# Altium PCB SD171-5.0PCB2.PcbDoc (part 3 of 5)
Units mm, origin at the board's own origin, x right, y up, seen from the top; angles counter-clockwise.
Board outline 152.27 x 99.6 mm, 6 copper layers (Top Layer, InternalPlane1, Mid-Layer 1, Mid-Layer 2, InternalPlane2, Bottom Layer); 325 components, 250 nets, 1794 pads, 490 vias.
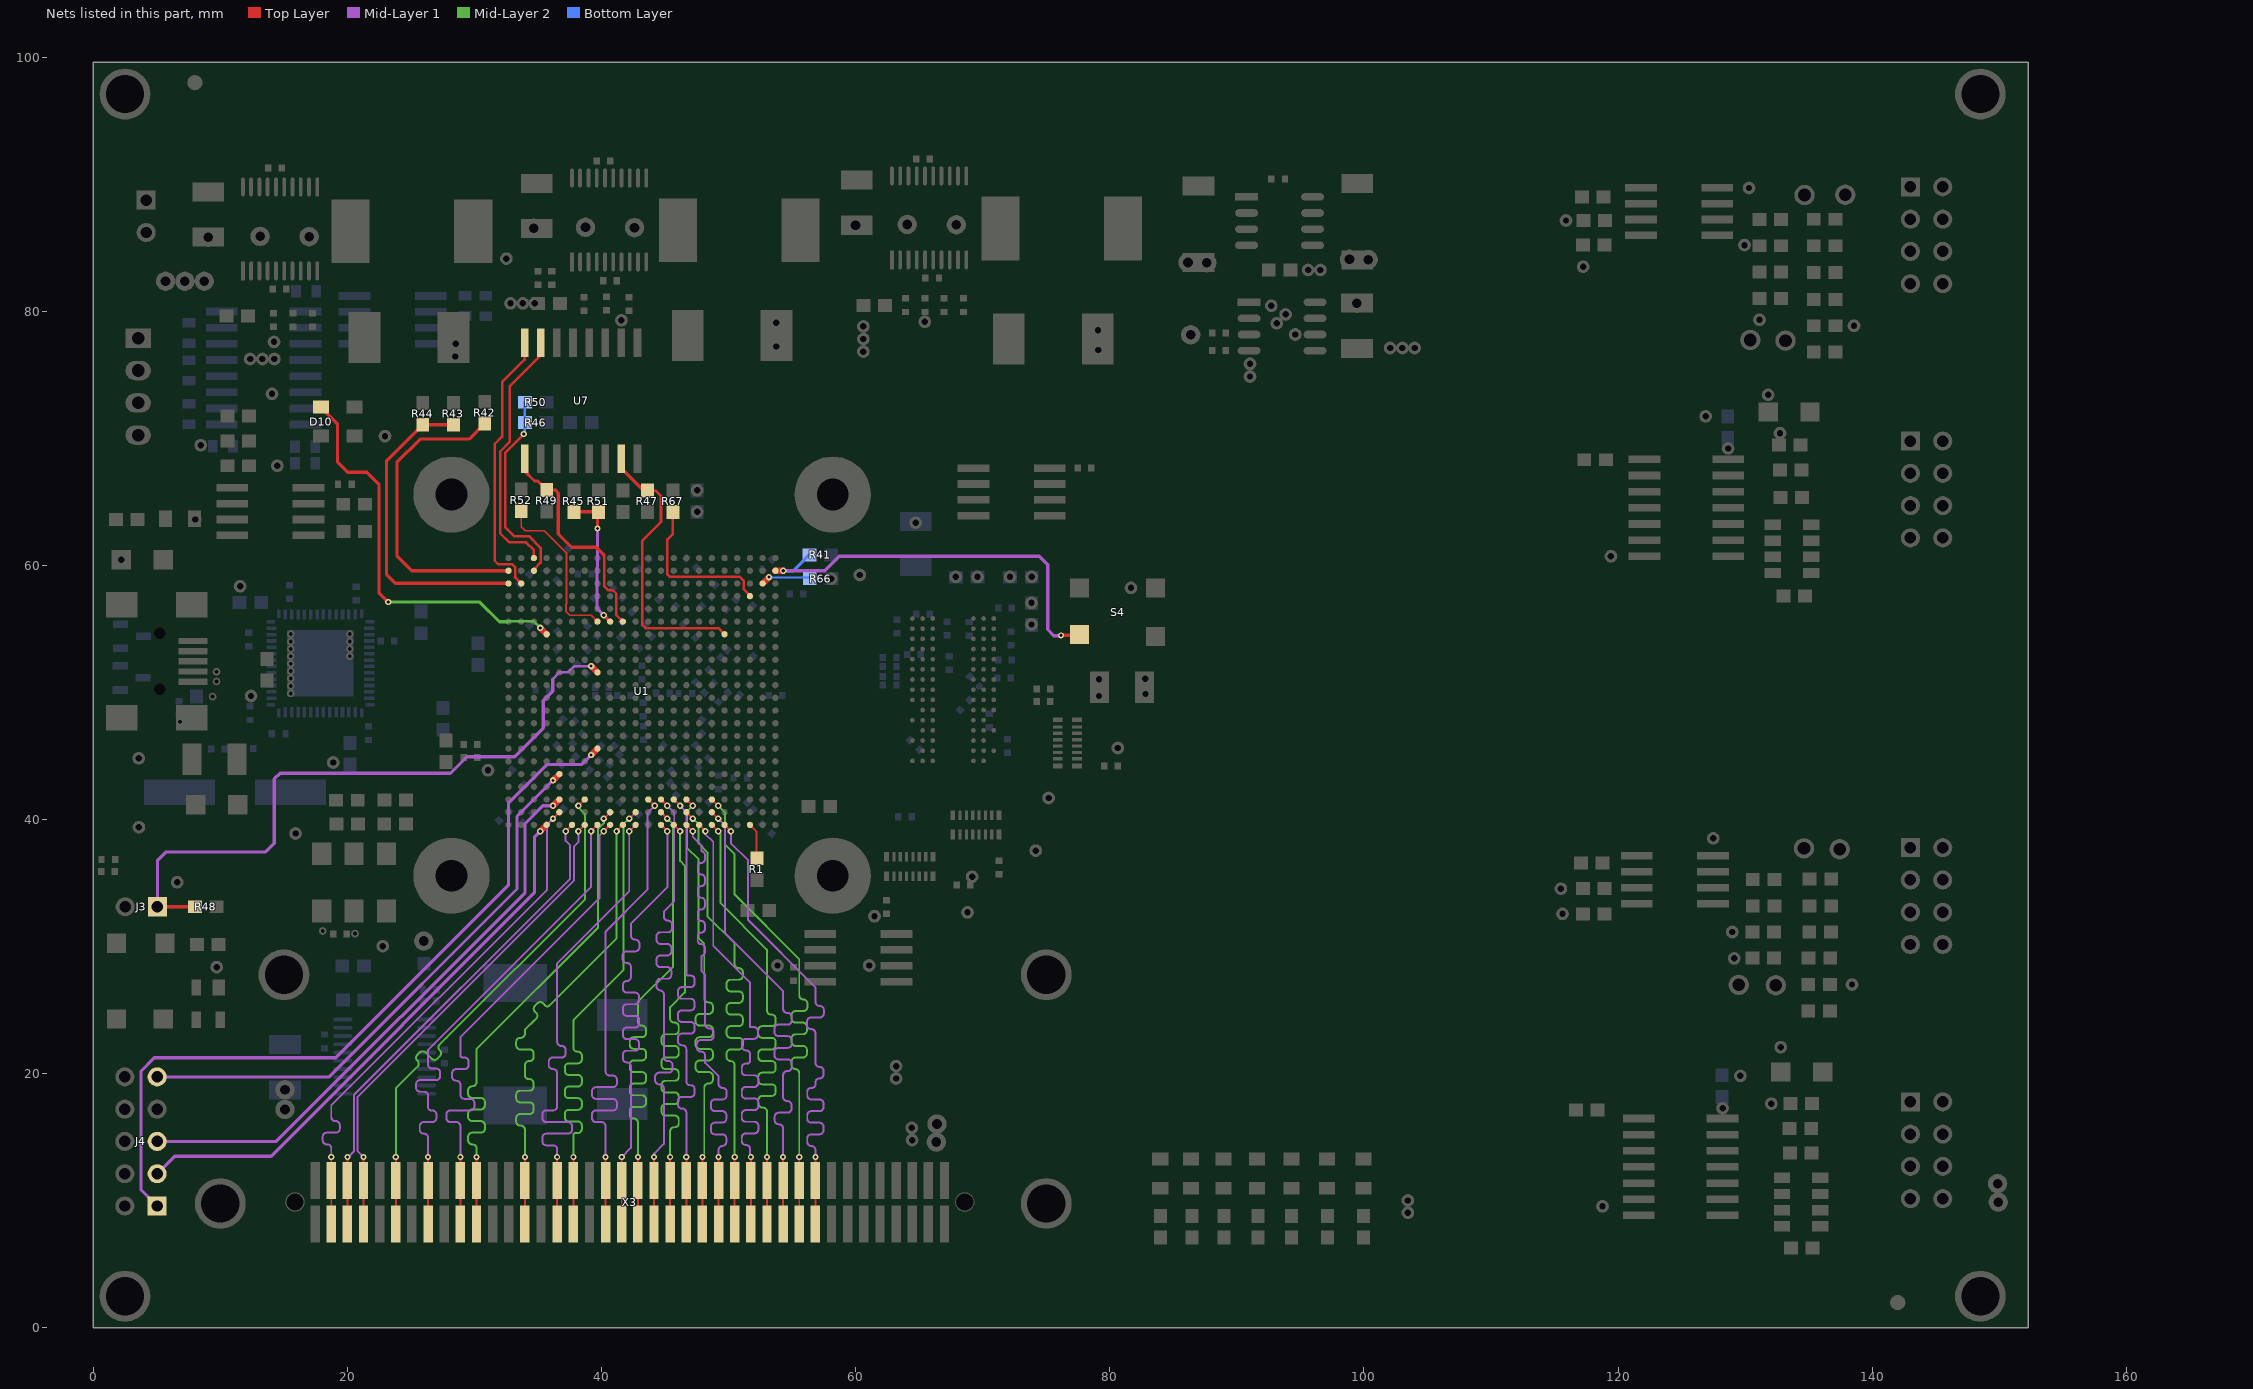
[diagram p7: the nets of this part, all layers, seen from the top]

## Via types
v1: diameter 0.508, hole 0.254, Top Layer to Bottom Layer, 259 vias
v2: diameter 0.483, hole 0.254, Top Layer to Bottom Layer, 230 vias
v3: diameter 0.483, hole 0.254, Top Layer to Bottom Layer, tented top, 1 vias

## Nets (pads, with @x,y where several pads share a name; then routed paths per layer and width w, separated by ;. In a path a pad name is that pad's centre, name@x,y a point inside that pad or via, vN(x,y) a via of type N, cw(c..) or ccw(c..) an arc to the next point about the centre after c; other vN are vias at no path point) (continued)
E-RXCLK: U1.B10 X3.39 X3.40 | length 41.7
  Top Layer w0.152: X3.39@42.86,8.191 X3.40@42.86,11.621 v2(42.86,13.449) ; U1.B10@44.68,40.589 v1(45.18,40.089)
  Mid-Layer 2 w0.152: 42.54,16.485 cw(c42.54,16.165) 42.86,16.165 42.86,15.824 v2(42.86,13.449) ; 42.541,16.485 cw(c42.541,16.805) 42.221,16.805 42.221,17.079 cw(c42.541,17.079) 42.541,17.399 42.86,17.399 43.179,17.399 ccw(c43.179,17.719) 43.499,17.719 43.499,17.993 ccw(c43.179,17.993) 43.179,18.313 42.86,18.313 42.541,18.313 cw(c42.541,18.633) 42.221,18.633 42.221,18.908 cw(c42.541,18.908) 42.541,19.228 42.86,19.228 43.179,19.228 ccw(c43.179,19.548) 43.499,19.548 43.499,19.822 ccw(c43.179,19.822) 43.179,20.142 42.86,20.142 42.541,20.142 cw(c42.541,20.462) 42.221,20.462 42.221,20.737 cw(c42.541,20.737) 42.541,21.057 42.86,21.057 43.179,21.057 ccw(c43.179,21.377) 43.499,21.377 43.499,21.651 ccw(c43.179,21.651) 43.179,21.971 42.86,21.971 42.541,21.971 cw(c42.541,22.291) 42.221,22.291 42.221,22.565 cw(c42.541,22.565) 42.541,22.885 42.86,22.885 43.18,22.885 ccw(c43.18,23.205) 43.5,23.205 43.5,23.48 ccw(c43.18,23.48) 43.18,23.8 cw(c43.18,24.12) 42.86,24.12 42.86,24.257 42.86,25.664 45.637,28.441 45.637,39.632 v1(45.18,40.089)
E-RXD0: U1.A8 X3.29 X3.30 | length 41.7
  Top Layer w0.152: U1.A8@46.68,39.589 v1(47.18,39.089) ; X3.29@49.21,8.191 X3.30@49.21,11.621 49.21,13.234 v2(49.21,13.449)
  Mid-Layer 1 w0.152: v1(47.18,39.089) 47.18,38.647 47.854,37.973 47.854,37.516 cw(c47.854,37.236) 48.133,37.236 48.133,36.881 cw(c47.854,36.881) 47.854,36.601 ccw(c47.854,36.322) 47.574,36.322 47.574,35.966 ccw(c47.854,35.966) 47.854,35.687 cw(c47.854,35.408) 48.133,35.408 48.133,35.052 cw(c47.854,35.052) 47.854,34.773 ccw(c47.854,34.493) 47.574,34.493 47.574,34.138 ccw(c47.854,34.138) 47.854,33.858 cw(c47.854,33.579) 48.133,33.579 48.133,33.223 cw(c47.854,33.223) 47.854,32.944 ccw(c47.854,32.664) 47.574,32.664 47.574,32.309 ccw(c47.854,32.309) 47.854,32.029 cw(c47.854,31.75) 48.133,31.75 48.133,31.394 cw(c47.854,31.394) 47.854,31.115 ccw(c47.854,30.836) 47.574,30.836 47.574,30.48 ccw(c47.854,30.48) 47.854,30.201 cw(c47.854,29.921) 48.133,29.921 48.133,29.566 cw(c47.854,29.566) 47.854,29.286 47.854,28.448 47.854,28.118 48.158,27.813 48.158,24.028 48.158,23.891 ccw(c48.478,23.891) 48.478,23.571 48.501,23.571 cw(c48.501,23.251) 48.822,23.251 48.822,22.977 cw(c48.501,22.977) 48.501,22.657 48.158,22.657 47.815,22.657 ccw(c47.815,22.337) 47.495,22.337 47.495,22.062 ccw(c47.815,22.062) 47.815,21.742 47.838,21.742 cw(c47.838,21.422) 48.158,21.422 48.158,21.285 48.158,20.864 49.21,19.812 49.21,19.355 49.21,19.218 ccw(c49.53,19.218) 49.53,18.898 cw(c49.53,18.578) 49.85,18.578 49.85,18.303 cw(c49.53,18.303) 49.53,17.983 49.21,17.983 48.919,17.983 ccw(c48.919,17.663) 48.599,17.663 48.599,17.389 ccw(c48.919,17.389) 48.919,17.069 49.21,17.069 49.501,17.069 cw(c49.501,16.749) 49.821,16.749 49.821,16.474 cw(c49.501,16.474) 49.501,16.154 49.21,16.154 48.919,16.154 ccw(c48.919,15.834) 48.599,15.834 48.599,15.56 ccw(c48.919,15.56) 48.919,15.24 49.21,15.24 49.501,15.24 cw(c49.501,14.92) 49.821,14.92 49.821,14.646 cw(c49.501,14.646) 49.501,14.326 ; v2(49.21,13.449) 49.21,13.894 49.21,14.006 cw(c49.53,14.006) 49.53,14.326 ; 49.511,14.326 49.52,14.326
E-RXD1: U1.B8 X3.27 X3.28 | length 41.7
  Top Layer w0.152: U1.B8@46.68,40.589 v1(47.18,40.089) ; X3.27@50.48,8.191 X3.28@50.48,11.621 v2(50.48,13.449)
  Mid-Layer 2 w0.152: v1(47.18,40.089) 47.637,39.632 47.637,38.133 48.336,37.434 48.336,32.41 50.48,30.267 50.48,28.778 50.48,28.641 ccw(c50.8,28.641) 50.8,28.321 cw(c50.8,28.001) 51.12,28.001 51.12,27.727 cw(c50.8,27.727) 50.8,27.407 50.48,27.407 50.163,27.407 ccw(c50.163,27.087) 49.843,27.087 49.843,26.812 ccw(c50.163,26.812) 50.163,26.492 50.48,26.492 50.797,26.492 cw(c50.797,26.172) 51.117,26.172 51.117,25.898 cw(c50.797,25.898) 50.797,25.578 50.48,25.578 50.163,25.578 ccw(c50.163,25.258) 49.843,25.258 49.843,24.983 ccw(c50.163,24.983) 50.163,24.663 50.48,24.663 50.797,24.663 cw(c50.797,24.343) 51.117,24.343 51.117,24.069 cw(c50.797,24.069) 50.797,23.749 50.48,23.749 50.163,23.749 ccw(c50.163,23.429) 49.843,23.429 49.843,23.155 ccw(c50.163,23.155) 50.163,22.835 50.48,22.835 50.797,22.835 cw(c50.797,22.515) 51.117,22.515 51.117,22.24 cw(c50.797,22.24) 50.797,21.92 50.48,21.92 50.163,21.92 ccw(c50.163,21.6) 49.843,21.6 49.843,21.326 ccw(c50.163,21.326) 50.163,21.006 ; 50.16,21.006 cw(c50.16,20.686) 50.48,20.686 50.48,20.447 v2(50.48,13.449) ; 50.161,21.006 50.162,21.006
E-RXD2: U1.C8 X3.31 X3.32 | length 41.7
  Top Layer w0.152: U1.C8@46.68,41.589 v1(47.18,41.089) ; X3.31@47.94,8.191 X3.32@47.94,11.621 v2(47.94,13.449)
  Mid-Layer 2 w0.152: v1(47.18,41.089) 46.723,40.632 46.723,37.783 47.637,36.869 47.637,30.671 48.082,30.226 48.082,26.086 48.082,25.949 ccw(c48.402,25.949) 48.402,25.629 48.44,25.629 cw(c48.44,25.309) 48.76,25.309 48.76,25.034 cw(c48.44,25.034) 48.44,24.714 48.082,24.714 47.725,24.714 ccw(c47.725,24.394) 47.405,24.394 47.405,24.12 ccw(c47.725,24.12) 47.725,23.8 48.082,23.8 48.44,23.8 cw(c48.44,23.48) 48.76,23.48 48.76,23.205 cw(c48.44,23.205) 48.44,22.885 48.082,22.885 47.725,22.885 ccw(c47.725,22.565) 47.405,22.565 47.405,22.291 ccw(c47.725,22.291) 47.725,21.971 48.082,21.971 48.44,21.971 cw(c48.44,21.651) 48.76,21.651 48.76,21.377 cw(c48.44,21.377) 48.44,21.057 48.082,21.057 47.725,21.057 ccw(c47.725,20.737) 47.405,20.737 47.405,20.462 ccw(c47.725,20.462) 47.725,20.142 48.082,20.142 48.44,20.142 cw(c48.44,19.822) 48.76,19.822 48.76,19.548 cw(c48.44,19.548) 48.44,19.228 48.402,19.228 ccw(c48.402,18.908) 48.082,18.908 48.082,17.374 48.082,13.591 v2(47.94,13.449)
E-RXD3: U1.A7 X3.25 X3.26 | length 41.7
  Top Layer w0.152: U1.A7@47.68,39.589 v1(48.18,39.089) ; X3.25@51.75,8.191 X3.26@51.75,11.621 v2@51.75,13.234
  Mid-Layer 1 w0.152: v1(48.18,39.089) 48.18,38.866 48.793,38.252 48.793,30.074 51.689,27.178 51.689,23.673 51.986,23.673 cw(c51.986,23.353) 52.306,23.353 52.306,23.078 cw(c51.986,23.078) 51.986,22.758 51.689,22.758 51.369,22.758 ccw(c51.369,22.438) 51.049,22.438 51.049,22.164 ccw(c51.369,22.164) 51.369,21.844 cw(c51.369,21.524) 51.689,21.524 51.689,21.387 51.689,21.057 cw(c51.435,21.057) 51.435,20.803 51.354,20.803 ccw(c51.354,20.483) 51.034,20.483 51.034,20.208 ccw(c51.354,20.208) 51.354,19.888 51.689,19.888 52.024,19.888 cw(c52.024,19.568) 52.344,19.568 52.344,19.294 cw(c52.024,19.294) 52.024,18.974 51.689,18.974 51.354,18.974 ccw(c51.354,18.654) 51.034,18.654 51.034,18.379 ccw(c51.354,18.379) 51.354,18.059 51.689,18.059 52.024,18.059 cw(c52.024,17.739) 52.344,17.739 52.344,17.465 cw(c52.024,17.465) 52.024,17.145 51.689,17.145 51.354,17.145 ccw(c51.354,16.825) 51.034,16.825 51.034,16.551 ccw(c51.354,16.551) 51.354,16.231 51.689,16.231 52.024,16.231 cw(c52.024,15.911) 52.344,15.911 52.344,15.636 cw(c52.024,15.636) 52.024,15.316 51.689,15.316 51.354,15.316 ccw(c51.354,14.996) 51.034,14.996 51.034,14.722 ccw(c51.354,14.722) 51.354,14.402 51.369,14.402 cw(c51.369,14.082) 51.689,14.082 51.689,13.945 51.689,13.51 v2(51.75,13.449)
E-RXD4: U1.A6 X3.23 X3.24 | length 41.7
  Top Layer w0.152: U1.A6@48.68,39.589 v1(49.18,39.089) ; X3.23@53.02,8.191 X3.24@53.02,11.621 v2(53.02,13.449)
  Mid-Layer 2 w0.152: v1(49.18,39.089) 49.378,38.891 49.378,33.426 53.02,29.784 53.02,25.121 53.02,24.983 ccw(c53.34,24.983) 53.34,24.663 53.386,24.663 cw(c53.386,24.343) 53.706,24.343 53.706,24.069 cw(c53.386,24.069) 53.386,23.749 53.02,23.749 52.654,23.749 ccw(c52.654,23.429) 52.334,23.429 52.334,23.155 ccw(c52.654,23.155) 52.654,22.835 53.02,22.835 53.386,22.835 cw(c53.386,22.515) 53.706,22.515 53.706,22.24 cw(c53.386,22.24) 53.386,21.92 53.02,21.92 52.654,21.92 ccw(c52.654,21.6) 52.334,21.6 52.334,21.326 ccw(c52.654,21.326) 52.654,21.006 53.02,21.006 53.386,21.006 cw(c53.386,20.686) 53.706,20.686 53.706,20.411 cw(c53.386,20.411) 53.386,20.091 53.02,20.091 52.654,20.091 ccw(c52.654,19.771) 52.334,19.771 52.334,19.497 ccw(c52.654,19.497) 52.654,19.177 53.02,19.177 53.386,19.177 cw(c53.386,18.857) 53.706,18.857 53.706,18.583 cw(c53.386,18.583) 53.386,18.263 53.02,18.263 52.654,18.263 ccw(c52.654,17.943) 52.334,17.943 52.334,17.668 ccw(c52.654,17.668) 52.654,17.348 52.7,17.348 cw(c52.7,17.028) 53.02,17.028 53.02,16.942 v2(53.02,13.449)
E-RXD5: U1.B6 X3.21 X3.22 | length 41.7
  Top Layer w0.152: U1.B6@48.68,40.589 v1(49.18,40.089) ; X3.21@54.29,8.191 X3.22@54.29,11.621 54.29,13.234 v2(54.29,13.449)
  Mid-Layer 1 w0.152: v1(49.18,40.089) 49.723,39.546 49.723,31.075 54.29,26.507 54.29,25.248 54.29,25.11 ccw(c54.61,25.11) 54.61,24.79 54.65,24.79 cw(c54.65,24.47) 54.97,24.47 54.97,24.196 cw(c54.65,24.196) 54.65,23.876 54.29,23.876 53.93,23.876 ccw(c53.93,23.556) 53.61,23.556 53.61,23.282 ccw(c53.93,23.282) 53.93,22.962 54.29,22.962 54.65,22.962 cw(c54.65,22.642) 54.97,22.642 54.97,22.367 cw(c54.65,22.367) 54.65,22.047 54.29,22.047 53.93,22.047 ccw(c53.93,21.727) 53.61,21.727 53.61,21.453 ccw(c53.93,21.453) 53.93,21.133 54.29,21.133 54.65,21.133 cw(c54.65,20.813) 54.97,20.813 54.97,20.538 cw(c54.65,20.538) 54.65,20.218 54.61,20.218 ccw(c54.61,19.898) 54.29,19.898 54.29,19.355 54.29,18.313 54.29,18.176 ccw(c54.61,18.176) 54.61,17.856 54.633,17.856 cw(c54.633,17.536) 54.953,17.536 54.953,17.262 cw(c54.633,17.262) 54.633,16.942 54.29,16.942 53.947,16.942 ccw(c53.947,16.622) 53.627,16.622 53.627,16.347 ccw(c53.947,16.347) 53.947,16.027 53.97,16.027 cw(c53.97,15.707) 54.29,15.707 54.29,15.418 v2(54.29,13.449)
E-RXD6: U1.A5 X3.17 X3.18 | length 41.7
  Top Layer w0.152: U1.A5@49.68,39.589 v1(50.18,39.089) ; X3.17@56.83,8.191 X3.18@56.83,11.621 56.83,13.234 v2(56.83,13.449)
  Mid-Layer 1 w0.152: v1(50.18,39.089) 50.18,38.161 51.537,36.805 51.537,32.106 56.83,26.812 56.83,25.806 56.83,25.669 ccw(c57.15,25.669) 57.15,25.349 57.173,25.349 cw(c57.173,25.029) 57.493,25.029 57.493,24.755 cw(c57.173,24.755) 57.173,24.435 56.83,24.435 56.487,24.435 ccw(c56.487,24.115) 56.167,24.115 56.167,23.84 ccw(c56.487,23.84) 56.487,23.52 56.51,23.52 cw(c56.51,23.2) 56.83,23.2 56.83,23.114 56.83,21.717 56.83,20.869 ccw(c57.15,20.869) 57.15,20.549 ; v2(56.83,13.449) 56.83,13.868 56.83,14.006 ccw(c56.51,14.006) 56.51,14.326 cw(c56.509,14.646) 56.189,14.646 56.189,14.92 cw(c56.509,14.92) 56.509,15.24 56.83,15.24 57.151,15.24 ccw(c57.151,15.56) 57.471,15.56 57.471,15.834 ccw(c57.151,15.834) 57.151,16.154 56.83,16.154 56.509,16.154 cw(c56.509,16.474) 56.189,16.474 56.189,16.749 cw(c56.509,16.749) 56.509,17.069 56.83,17.069 57.151,17.069 ccw(c57.151,17.389) 57.471,17.389 57.471,17.663 ccw(c57.151,17.663) 57.151,17.983 56.83,17.983 56.509,17.983 cw(c56.509,18.303) 56.189,18.303 56.189,18.578 cw(c56.509,18.578) 56.509,18.898 56.551,18.898 ccw(c56.551,19.177) 56.83,19.177 56.83,19.314 cw(c57.15,19.314) 57.15,19.634 ; 57.151,19.634 ccw(c57.151,19.954) 57.471,19.954 57.471,20.229 ccw(c57.151,20.229) 57.151,20.549
E-RXD7: U1.C6 X3.19 X3.20 | length 41.7
  Top Layer w0.152: U1.C6@48.68,41.589 v1(49.18,41.089) ; X3.19@55.56,8.191 X3.20@55.56,11.621 v2(55.56,13.449)
  Mid-Layer 2 w0.152: v1(49.18,41.089) 49.723,40.546 49.723,38.039 50.47,37.292 50.47,34.112 55.56,29.022 55.56,26.314 55.56,26.177 ccw(c55.88,26.177) 55.88,25.857 cw(c55.88,25.537) 56.2,25.537 56.2,25.263 cw(c55.88,25.263) 55.88,24.943 55.56,24.943 55.275,24.943 ccw(c55.275,24.623) 54.955,24.623 54.955,24.348 ccw(c55.275,24.348) 55.275,24.028 55.56,24.028 55.845,24.028 cw(c55.845,23.708) 56.165,23.708 56.165,23.434 cw(c55.845,23.434) 55.845,23.114 55.56,23.114 55.275,23.114 ccw(c55.275,22.794) 54.955,22.794 54.955,22.52 ccw(c55.275,22.52) 55.275,22.2 55.56,22.2 55.845,22.2 cw(c55.845,21.88) 56.165,21.88 56.165,21.605 cw(c55.845,21.605) 55.845,21.285 55.56,21.285 55.275,21.285 ccw(c55.275,20.965) 54.955,20.965 54.955,20.691 ccw(c55.275,20.691) 55.275,20.371 ; 55.24,20.371 cw(c55.24,20.051) 55.56,20.051 55.56,17.45 v2(55.56,13.449) ; 55.25,20.371 55.265,20.371
E-RXDV: U1.A9 X3.35 X3.36 | length 41.7
  Top Layer w0.152: X3.35@45.4,8.191 X3.36@45.4,11.621 v2(45.4,13.449) ; U1.A9@45.68,39.589 v1(46.18,39.089)
  Mid-Layer 2 w0.152: v2(45.4,13.449) 45.4,14.859 45.4,15.479 cw(c45.72,15.479) 45.72,15.799 45.758,15.799 ccw(c45.758,16.119) 46.078,16.119 46.078,16.393 ccw(c45.758,16.393) 45.758,16.713 45.4,16.713 45.042,16.713 cw(c45.042,17.033) 44.722,17.033 44.722,17.308 cw(c45.042,17.308) 45.042,17.628 45.4,17.628 45.758,17.628 ccw(c45.758,17.948) 46.078,17.948 46.078,18.222 ccw(c45.758,18.222) 45.758,18.542 45.4,18.542 45.042,18.542 cw(c45.042,18.862) 44.722,18.862 44.722,19.136 cw(c45.042,19.136) 45.042,19.456 45.4,19.456 45.758,19.456 ccw(c45.758,19.776) 46.078,19.776 46.078,20.051 ccw(c45.758,20.051) 45.758,20.371 45.4,20.371 45.042,20.371 cw(c45.042,20.691) 44.722,20.691 44.722,20.965 cw(c45.042,20.965) 45.042,21.285 45.4,21.285 45.758,21.285 ccw(c45.758,21.605) 46.078,21.605 46.078,21.88 ccw(c45.758,21.88) 45.758,22.2 45.4,22.2 45.042,22.2 cw(c45.042,22.52) 44.722,22.52 44.722,22.794 cw(c45.042,22.794) 45.042,23.114 45.4,23.114 45.758,23.114 ccw(c45.758,23.434) 46.078,23.434 46.078,23.708 ccw(c45.758,23.708) 45.758,24.028 45.72,24.028 cw(c45.72,24.348) 45.4,24.348 45.4,24.486 45.4,25.258 46.558,26.416 46.558,36.373 46.18,36.751 v1(46.18,39.089)
E-RXER: U1.C9 X3.33 X3.34 | length 41.7
  Top Layer w0.152: U1.C9@45.68,41.589 v1(46.18,41.089) ; X3.33@46.67,8.191 X3.34@46.67,11.621 46.67,13.234 v2(46.67,13.449)
  Mid-Layer 1 w0.152: v1(46.18,41.089) 46.67,40.599 46.67,27.864 ccw(c46.797,27.864) 46.797,27.737 47.009,27.737 cw(c47.009,27.417) 47.329,27.417 47.329,27.142 cw(c47.009,27.142) 47.009,26.822 46.67,26.822 46.331,26.822 ccw(c46.331,26.502) 46.011,26.502 46.011,26.228 ccw(c46.331,26.228) 46.331,25.908 46.67,25.908 47.009,25.908 cw(c47.009,25.588) 47.329,25.588 47.329,25.314 cw(c47.009,25.314) 47.009,24.994 46.67,24.994 46.331,24.994 ccw(c46.331,24.674) 46.011,24.674 46.011,24.399 ccw(c46.331,24.399) 46.331,24.079 46.67,24.079 47.009,24.079 cw(c47.009,23.759) 47.329,23.759 47.329,23.485 cw(c47.009,23.485) 47.009,23.165 46.67,23.165 46.331,23.165 ccw(c46.331,22.845) 46.011,22.845 46.011,22.57 ccw(c46.331,22.57) 46.331,22.25 46.35,22.25 cw(c46.35,21.93) 46.67,21.93 46.67,21.793 46.67,19.558 46.67,19.421 ccw(c46.99,19.421) 46.99,19.101 47.013,19.101 cw(c47.013,18.781) 47.333,18.781 47.333,18.506 cw(c47.013,18.506) 47.013,18.186 46.67,18.186 46.327,18.186 ccw(c46.327,17.866) 46.007,17.866 46.007,17.592 ccw(c46.327,17.592) 46.327,17.272 46.35,17.272 cw(c46.35,16.952) 46.67,16.952 46.67,16.205 46.67,15.067 v2(46.67,13.449)
E-TXCLK: U1.A10 X3.41 X3.42 | length 41.7
  Top Layer w0.152: X3.41@41.59,8.191 X3.42@41.59,11.621 41.59,13.234 v2(41.59,13.449) ; U1.A10@44.68,39.589 v1(45.18,39.089)
  Mid-Layer 1 w0.152: v2(41.59,13.449) 42.316,14.176 42.316,20.447 42.316,20.584 ccw(c41.996,20.584) 41.996,20.904 41.995,20.904 cw(c41.995,21.224) 41.675,21.224 41.675,21.499 cw(c41.995,21.499) 41.995,21.819 42.316,21.819 42.638,21.819 ccw(c42.638,22.139) 42.958,22.139 42.958,22.413 ccw(c42.638,22.413) 42.638,22.733 42.316,22.733 41.995,22.733 cw(c41.995,23.053) 41.675,23.053 41.675,23.327 cw(c41.995,23.327) 41.995,23.647 42.316,23.647 42.638,23.647 ccw(c42.638,23.967) 42.958,23.967 42.958,24.242 ccw(c42.638,24.242) 42.638,24.562 42.316,24.562 41.995,24.562 cw(c41.995,24.882) 41.675,24.882 41.675,25.156 cw(c41.995,25.156) 41.995,25.476 42.316,25.476 42.638,25.476 ccw(c42.638,25.796) 42.958,25.796 42.958,26.071 ccw(c42.638,26.071) 42.638,26.391 42.316,26.391 41.995,26.391 cw(c41.995,26.711) 41.675,26.711 41.675,26.985 cw(c41.995,26.985) 41.995,27.305 41.996,27.305 ccw(c41.996,27.625) 42.316,27.625 42.316,27.94 42.316,28.27 42.316,28.407 ccw(c41.996,28.407) 41.996,28.727 41.973,28.727 cw(c41.973,29.047) 41.653,29.047 41.653,29.322 cw(c41.973,29.322) 41.973,29.642 42.316,29.642 42.659,29.642 ccw(c42.659,29.962) 42.98,29.962 42.98,30.236 ccw(c42.659,30.236) 42.659,30.556 42.636,30.556 cw(c42.636,30.876) 42.316,30.876 42.316,31.521 42.316,31.826 45.18,34.69 v1(45.18,39.089)
E-TXD0: U1.A12 X3.49 X3.50 | length 41.7
  Top Layer w0.152: X3.49@36.51,8.191 X3.50@36.51,11.621 36.51,13.234 v2(36.51,13.449) ; v1(42.18,39.089) U1.A12@42.68,39.589
  Mid-Layer 1 w0.152: v2(36.51,13.449) 36.51,13.919 36.51,14.056 ccw(c36.19,14.056) 36.19,14.376 35.662,14.376 cw(c35.662,14.696) 35.342,14.696 35.342,14.971 cw(c35.662,14.971) 35.662,15.291 36.51,15.291 37.358,15.291 ccw(c37.358,15.611) 37.678,15.611 37.678,15.885 ccw(c37.358,15.885) 37.358,16.205 36.51,16.205 35.662,16.205 cw(c35.662,16.525) 35.342,16.525 35.342,16.8 cw(c35.662,16.8) 35.662,17.12 36.19,17.12 ccw(c36.19,17.44) 36.51,17.44 36.51,18.999 36.51,19.914 36.51,20.051 ccw(c36.19,20.051) 36.19,20.371 36.165,20.371 cw(c36.165,20.691) 35.845,20.691 35.845,20.965 cw(c36.165,20.965) 36.165,21.285 36.51,21.285 36.855,21.285 ccw(c36.855,21.605) 37.175,21.605 37.175,21.88 ccw(c36.855,21.88) 36.855,22.2 36.83,22.2 cw(c36.83,22.52) 36.51,22.52 36.51,22.555 36.51,28.687 42.18,34.357 v1(42.18,39.089)
E-TXD1: U1.B12 X3.47 X3.48 | length 41.7
  Top Layer w0.152: X3.47@37.78,8.191 X3.48@37.78,11.621 v2(37.78,13.449) ; v1(42.18,40.089) U1.B12@42.68,40.589
  Mid-Layer 2 w0.152: v2(37.78,13.449) 37.78,15.189 cw(c37.932,15.189) 37.932,15.342 38.131,15.342 ccw(c38.131,15.662) 38.451,15.662 38.451,15.936 ccw(c38.131,15.936) 38.131,16.256 37.78,16.256 37.429,16.256 cw(c37.429,16.576) 37.109,16.576 37.109,16.85 cw(c37.429,16.85) 37.429,17.17 37.78,17.17 38.131,17.17 ccw(c38.131,17.49) 38.451,17.49 38.451,17.765 ccw(c38.131,17.765) 38.131,18.085 37.78,18.085 37.429,18.085 cw(c37.429,18.405) 37.109,18.405 37.109,18.679 cw(c37.429,18.679) 37.429,18.999 37.78,18.999 38.131,18.999 ccw(c38.131,19.319) 38.451,19.319 38.451,19.594 ccw(c38.131,19.594) 38.131,19.914 37.78,19.914 37.429,19.914 cw(c37.429,20.234) 37.109,20.234 37.109,20.508 cw(c37.429,20.508) 37.429,20.828 37.78,20.828 38.131,20.828 ccw(c38.131,21.148) 38.451,21.148 38.451,21.422 ccw(c38.131,21.422) 38.131,21.742 38.1,21.742 cw(c38.1,22.062) 37.78,22.062 37.78,22.2 37.78,24.216 41.723,28.159 41.723,39.632 v1(42.18,40.089)
E-TXD2: U1.A13 X3.53 X3.54 | length 41.7
  Top Layer w0.152: X3.53@33.97,8.191 X3.54@33.97,11.621 33.97,13.234 v2(33.97,13.449) ; v1(41.18,39.089) U1.A13@41.68,39.589
  Mid-Layer 2 w0.152: v2(33.97,13.449) 33.97,15.469 33.97,15.606 ccw(c33.65,15.606) 33.65,15.926 33.604,15.926 cw(c33.604,16.246) 33.284,16.246 33.284,16.52 cw(c33.604,16.52) 33.604,16.84 33.97,16.84 34.336,16.84 ccw(c34.336,17.16) 34.656,17.16 34.656,17.435 ccw(c34.336,17.435) 34.336,17.755 33.97,17.755 33.604,17.755 cw(c33.604,18.075) 33.284,18.075 33.284,18.349 cw(c33.604,18.349) 33.604,18.669 33.97,18.669 34.336,18.669 ccw(c34.336,18.989) 34.656,18.989 34.656,19.263 ccw(c34.336,19.263) 34.336,19.583 34.29,19.583 cw(c34.29,19.903) 33.97,19.903 33.97,20.498 33.97,20.549 33.97,20.686 cw(c34.29,20.686) 34.29,21.006 34.336,21.006 ccw(c34.336,21.326) 34.656,21.326 34.656,21.6 ccw(c34.336,21.6) 34.336,21.92 33.97,21.92 33.604,21.92 cw(c33.604,22.24) 33.284,22.24 33.284,22.515 cw(c33.604,22.515) 33.604,22.835 33.65,22.835 ccw(c33.65,23.155) 33.97,23.155 33.97,23.165 33.97,23.454 34.764,24.249 34.861,24.346 ccw(c34.635,24.572) 34.861,24.798 34.757,24.902 cw(c34.983,25.129) 34.757,25.355 34.951,25.549 cw(c35.177,25.323) 35.404,25.549 35.591,25.362 ccw(c35.734,25.505) 35.878,25.362 41.18,30.664 v1(41.18,39.089)
E-TXD3: U1.A14 X3.61 X3.62 | length 41.7
  Top Layer w0.152: X3.61@28.89,8.191 X3.62@28.89,11.621 28.89,13.234 v2(28.89,13.449) ; v1(40.18,39.089) U1.A14@40.68,39.589
  Mid-Layer 1 w0.152: v2(28.89,13.449) 28.89,15.885 ccw(c28.57,15.885) 28.57,16.205 28.106,16.205 cw(c28.106,16.525) 27.786,16.525 27.786,16.8 cw(c28.106,16.8) 28.106,17.12 29.674,17.12 ccw(c29.674,17.44) 29.994,17.44 29.994,17.714 ccw(c29.674,17.714) 29.674,18.034 29.21,18.034 cw(c29.21,18.354) 28.89,18.354 28.89,18.999 28.89,19.136 ccw(c28.57,19.136) 28.57,19.456 28.562,19.456 cw(c28.562,19.776) 28.242,19.776 28.242,20.051 cw(c28.562,20.051) 28.562,20.371 28.89,20.371 29.218,20.371 ccw(c29.218,20.691) 29.538,20.691 29.538,20.965 ccw(c29.218,20.965) 29.218,21.285 29.068,21.285 cw(c29.068,21.463) 28.89,21.463 28.89,22.87 39.827,33.807 39.827,38.736 v1(40.18,39.089)
E-TXD4: U1.B14 X3.59 X3.60 | length 41.7
  Top Layer w0.152: X3.59@30.16,8.191 X3.60@30.16,11.621 v2(30.16,13.449) ; v1(40.18,40.089) U1.B14@40.68,40.589
  Mid-Layer 2 w0.152: v2(30.16,13.449) 30.16,13.995 30.16,14.133 ccw(c29.84,14.133) 29.84,14.453 29.821,14.453 cw(c29.821,14.773) 29.501,14.773 29.501,15.047 cw(c29.821,15.047) 29.821,15.367 30.16,15.367 30.499,15.367 ccw(c30.499,15.687) 30.82,15.687 30.82,15.961 ccw(c30.499,15.961) 30.499,16.281 30.16,16.281 29.821,16.281 cw(c29.821,16.601) 29.501,16.601 29.501,16.876 cw(c29.821,16.876) 29.821,17.196 30.16,17.196 30.499,17.196 ccw(c30.499,17.516) 30.82,17.516 30.82,17.79 ccw(c30.499,17.79) 30.499,18.11 30.16,18.11 29.821,18.11 cw(c29.821,18.43) 29.501,18.43 29.501,18.705 cw(c29.821,18.705) 29.821,19.025 29.84,19.025 ccw(c29.84,19.345) 30.16,19.345 30.16,20.168 30.16,21.93 39.723,31.493 39.723,39.278 40.18,39.735 v1(40.18,40.089)
E-TXD5: U1.A15 X3.65 X3.66 | length 41.7
  Top Layer w0.152: X3.65@26.35,8.191 v2(26.35,13.449) ; v1(39.18,39.089) U1.A15@39.68,39.589
  Mid-Layer 1 w0.152: v2(26.35,13.449) 26.35,13.98 26.35,14.834 26.35,14.971 ccw(c26.03,14.971) 26.03,15.291 26.014,15.291 cw(c26.014,15.611) 25.694,15.611 25.694,15.885 cw(c26.014,15.885) 26.014,16.205 26.35,16.205 26.686,16.205 ccw(c26.686,16.525) 27.006,16.525 27.006,16.8 ccw(c26.686,16.8) 26.686,17.12 26.604,17.12 cw(c26.604,17.374) 26.35,17.374 26.35,18.11 26.35,18.273 ccw(c26.03,18.273) 26.03,18.593 25.725,18.593 cw(c25.725,18.913) 25.405,18.913 25.405,19.187 cw(c25.725,19.187) 25.725,19.507 26.35,19.507 26.975,19.507 ccw(c26.975,19.827) 27.295,19.827 27.295,20.102 ccw(c26.975,20.102) 26.975,20.422 26.67,20.422 cw(c26.67,20.742) 26.35,20.742 26.35,20.879 26.35,21.88 39.18,34.71 v1(39.18,39.089)
E-TXD6: U1.C16 X3.69 X3.70 | length 41.7
  Top Layer w0.152: X3.69@23.81,8.191 X3.70@23.81,11.621 v2(23.81,13.449) ; v1(38.18,41.089) U1.C16@38.68,41.589
  Mid-Layer 2 w0.152: v2(23.81,13.449) 23.81,18.857 25.422,20.469 25.519,20.566 ccw(c25.293,20.793) 25.519,21.019 25.503,21.035 cw(c25.729,21.262) 25.503,21.488 25.697,21.682 cw(c25.923,21.456) 26.15,21.682 26.392,21.439 26.635,21.197 ccw(c26.861,21.423) 27.088,21.197 27.282,21.391 ccw(c27.055,21.617) 27.282,21.843 27.265,21.86 cw(c27.492,22.086) 27.265,22.312 27.788,22.835 38.71,33.757 38.71,40.437 v1@38.18,40.966
E-TXD_N: U1.A17 X3.75 X3.76 | length 39.1
  Top Layer w0.159: X3.75@20,8.191 X3.76@20,11.621 v2(20,13.449) ; v1(37.18,39.089) U1.A17@37.68,39.589
  Mid-Layer 1 w0.152: v2(20,13.449) v2@20.079,13.449
  Mid-Layer 1 w0.159: v2@20.079,13.449 20.517,13.887 20.517,18.332 37.537,35.353 37.537,37.977 37.18,38.334 v1(37.18,39.089)
E-TXD_P: U1.A16 X3.73 X3.74 | length 39
  Top Layer w0.159: X3.73@21.27,8.191 v2(21.27,13.449) ; v1(38.18,39.089) U1.A16@38.68,39.589
  Mid-Layer 1 w0.159: v2(21.27,13.449) 21.27,13.452 20.803,13.919 20.803,18.189 37.823,35.209 37.823,37.871 38.18,38.229 v1(38.18,39.089)
E-TXEN: U1.C11 X3.43 X3.44 | length 41.7
  Top Layer w0.152: X3.43@40.32,8.191 X3.44@40.32,11.621 v2(40.32,13.449) ; U1.C11@43.68,41.589 v1(44.18,41.089)
  Mid-Layer 1 w0.152: v2(40.32,13.449) 40.32,15.748 40.32,15.885 ccw(c40,15.885) 40,16.205 39.567,16.205 cw(c39.567,16.525) 39.247,16.525 39.247,16.8 cw(c39.567,16.8) 39.567,17.12 40.32,17.12 40.895,17.12 ccw(c40.895,17.44) 41.215,17.44 41.215,17.714 ccw(c40.895,17.714) 40.895,18.034 40.32,18.034 39.567,18.034 cw(c39.567,18.354) 39.247,18.354 39.247,18.628 cw(c39.567,18.628) 39.567,18.948 40.32,18.948 40.895,18.948 ccw(c40.895,19.268) 41.215,19.268 41.215,19.543 ccw(c40.895,19.543) 40.895,19.863 40.64,19.863 cw(c40.64,20.183) 40.32,20.183 40.32,21.26 40.32,31.201 43.612,34.493 43.612,40.521 v1(44.18,41.089)
E-TXER: U1.C10 X3.37 X3.38 | length 41.7
  Top Layer w0.152: X3.37@44.13,8.191 X3.38@44.13,11.621 44.13,13.234 v2(44.13,13.449) ; U1.C10@44.68,41.589 v1(45.18,41.089)
  Mid-Layer 1 w0.152: v2(44.13,13.449) 44.13,13.716 44.907,14.493 44.907,18.11 44.907,18.857 ccw(c44.587,18.857) 44.587,19.177 44.538,19.177 cw(c44.538,19.497) 44.218,19.497 44.218,19.771 cw(c44.538,19.771) 44.538,20.091 44.907,20.091 45.276,20.091 ccw(c45.276,20.411) 45.596,20.411 45.596,20.686 ccw(c45.276,20.686) 45.276,21.006 45.227,21.006 cw(c45.227,21.326) 44.907,21.326 44.907,21.463 44.907,25.73 44.907,26.248 ccw(c44.587,26.248) 44.587,26.568 ; 44.603,26.568 44.627,26.568 ; 44.643,26.568 cw(c44.643,26.888) 44.323,26.888 44.323,27.163 cw(c44.643,27.163) 44.643,27.483 44.907,27.483 45.172,27.483 ccw(c45.172,27.803) 45.492,27.803 45.492,28.077 ccw(c45.172,28.077) 45.172,28.397 44.907,28.397 44.643,28.397 cw(c44.643,28.717) 44.323,28.717 44.323,28.992 cw(c44.643,28.992) 44.643,29.312 44.907,29.312 45.172,29.312 ccw(c45.172,29.632) 45.492,29.632 45.492,29.906 ccw(c45.172,29.906) 45.172,30.226 44.907,30.226 44.643,30.226 cw(c44.643,30.546) 44.323,30.546 44.323,30.82 cw(c44.643,30.82) 44.643,31.14 44.907,31.14 45.227,31.14 ccw(c45.227,31.46) 45.547,31.46 45.547,31.735 ccw(c45.227,31.735) 45.227,32.055 cw(c45.227,32.375) 44.907,32.375 44.907,32.512 44.907,32.766 45.723,33.582 45.723,38.899 45.723,40.546 v1(45.18,41.089)
E_RESET: U1.B18 X3.77 X3.78 | length 41.7
  Top Layer w0.152: X3.77@18.73,8.191 X3.78@18.73,11.621 18.73,13.234 v2(18.73,13.449) ; v1(36.18,40.089) U1.B18@36.68,40.589
  Mid-Layer 1 w0.152: v2(18.73,13.449) 18.73,13.995 18.73,14.133 ccw(c18.41,14.133) 18.41,14.453 18.377,14.453 cw(c18.377,14.773) 18.057,14.773 18.057,15.047 cw(c18.377,15.047) 18.377,15.367 18.73,15.367 19.083,15.367 ccw(c19.083,15.687) 19.403,15.687 19.403,15.961 ccw(c19.083,15.961) 19.083,16.281 19.05,16.281 cw(c19.05,16.601) 18.73,16.601 18.73,16.612 18.73,17.511 35.712,34.493 35.712,39.624 36.177,40.089 v1(36.18,40.089)
FPGA_AWAKE: D10.1 U1.T19 | length 32
  Top Layer w0.254: D10.1@17.932,72.466 17.932,72.415 19.228,71.12 19.228,68.123 20.015,67.335 21.539,67.335 22.479,66.396 22.479,57.861 v2(23.216,57.125)
  Top Layer w0.5: v1(35.18,55.089) U1.T19@35.68,54.589
  Mid-Layer 2 w0.203: 32.664,55.601 34.668,55.601 v1(35.18,55.089)
  Mid-Layer 2 w0.254: v2(23.216,57.125) 30.426,57.125 31.97,55.581 32.645,55.581 32.664,55.601
FPGA_CCLK: U1.Y21 U7.16 | length 21.4
  Top Layer w0.203: U1.Y21@33.68,58.589 33.18,59.089 33.201,59.11 33.201,59.868 32.959,60.11 31.863,60.11 31.598,60.376 31.598,69.571 32.182,70.155 32.182,74.447 33.945,76.211 U7.16@33.945,77.538
FPGA_DONE: R43.1 R44.1 U1.Y22 | length 25.3
  Top Layer w0.152: U1.Y22@32.672,58.597 U1.Y22@32.68,58.589
  Top Layer w0.254: R43.1@28.346,71.082 R44.1@25.933,71.082 23.089,68.237 23.089,59.284 23.775,58.597 U1.Y22@32.672,58.597
FPGA_HSWAPEN: R1.2 U1.A3 | length 2.8
  Top Layer w0.152: U1.A3@51.68,39.589 52.18,39.089 52.18,37.012 R1.2@52.222,36.97
FPGA_M0: R42.1 U1.AA22 | length 24.8
  Top Layer w0.254: R42.1@30.81,71.183 29.578,69.952 25.73,69.952 23.901,68.123 23.901,60.757 25.069,59.589 U1.AA22@32.68,59.589
FPGA_M1: R52.1 U1.U15 | length 13.1
  Top Layer w0.152: R52.1@33.68,64.275 33.68,63.043 33.985,62.738 35.509,62.738 37.227,61.02 37.227,56.963 37.211,56.947 37.211,56.718 37.211,56.363 37.485,56.089 38.506,56.089 39.18,56.089 U1.U15@39.68,55.589
FPGA_MISO0: U1.AB20 U7.15 | length 20.1
  Top Layer w0.203: U1.AB20@34.68,60.589 34.68,61.214 34.07,61.824 32.741,61.824 32.029,62.535 32.029,68.986 32.791,69.748 32.791,74.117 35.215,76.541 U7.15@35.215,77.538
FPGA_MISO1: R46.1 R50.1 U1.AA20 | length 15.9
  Top Layer w0.203: v2(33.884,70.358) 33.884,70.333 32.428,68.877 32.428,62.999 33.122,62.306 34.29,62.306 35.204,61.392 35.204,60.793 35.201,60.79 35.201,60.22 34.68,59.699 U1.AA20@34.68,59.589
  Bottom Layer w0.203: v2(33.884,70.358) 33.972,70.447 R50.1@33.972,72.847
FPGA_MISO2: R45.2 R51.1 U1.U14 | length 11.1
  Top Layer w0.254: R45.2@37.821,64.198 37.846,64.224 R51.1@39.751,64.224 39.675,64.148 v2(39.675,62.916) ; v1(40.18,56.089) U1.U14@40.68,55.589
  Mid-Layer 1 w0.254: v2(39.675,62.916) 39.688,62.903 39.688,59.878 39.649,59.84 39.649,56.619 v1(40.18,56.089)
FPGA_MISO3: R49.1 U1.U13 U7.1 | length 17.9
  Top Layer w0.203: 40.183,60.808 40.201,60.789 40.201,58.391 40.525,58.067 40.878,58.067 41.159,57.787 41.159,56.11 U1.U13@41.68,55.589
  Top Layer w0.254: U7.1@33.945,68.388 33.945,67.43 34.725,66.65 34.989,66.65 R49.1@35.687,65.951 36.36,65.951 36.601,65.71 36.601,62.48 37.639,61.443 39.599,61.443 40.183,60.858 40.183,60.808
FPGA_ONCHIP_TERM1: R66.1 U1.Y2 | length 4
  Top Layer w0.5: U1.Y2@52.68,58.589 v1(53.18,59.089)
  Bottom Layer w0.152: v1@53.214,59.055 56.31,59.055 R66.1@56.386,58.979
  Bottom Layer w0.203: v1(53.18,59.089) v1@53.214,59.055
FPGA_ONCHIP_TERM2: R67.1 U1.W3 | length 12.7
  Top Layer w0.203: R67.1@45.618,64.198 45.618,62.484 45.187,62.052 45.187,59.309 45.385,59.11 50.887,59.11 51.201,58.796 51.201,58.12 51.68,57.642 U1.W3@51.68,57.589
FPGA_PROG_B: R41.1 S4.1 U1.AA1 | length 32.6
  Top Layer w0.254: v2(76.149,54.508) 77.572,54.508 S4.1@77.622,54.559
  Top Layer w0.5: U1.AA1@53.68,59.589 v1(54.305,59.588)
  Mid-Layer 1 w0.254: v1(54.305,59.588) 57.556,59.588 58.699,60.731 74.447,60.731 75.108,60.071 75.108,54.966 75.59,54.483 76.149,54.483 v2(76.149,54.508)
  Bottom Layer w0.254: v1(54.305,59.588) 55.105,59.588 R41.1@56.361,60.844
FPGA_SPI_CS: R47.1 U1.T5 U7.7 | length 22
  Top Layer w0.203: 43.51,55.067 43.49,55.067 ; R47.1@43.612,65.9 44.234,65.9 44.679,65.456 44.679,63.424 43.201,61.947 43.201,55.356 43.49,55.067 ; U1.T5@49.68,54.589 49.201,55.067 43.49,55.067
  Top Layer w0.254: U7.7@41.565,68.388 41.565,67.655 R47.1@43.32,65.9
FPGA_SUSPEND: J3.1 R48.2 U1.N15 | length 52.6
  Top Layer w0.254: J3.1@5.055,33.147 R48.2@8.014,33.147
  Top Layer w0.5: v1(39.18,52.089) U1.N15@39.68,51.589
  Mid-Layer 1 w0.203: 36.17,51.079 36.696,51.606 37.38,51.606 37.862,52.089 v1(39.18,52.089)
  Mid-Layer 1 w0.254: J3.1@5.055,33.147 5.055,36.779 5.74,37.465 13.564,37.465 14.249,38.151 14.249,43.205 14.707,43.663 28.118,43.663 29.413,44.958 33.172,44.958 35.42,47.206 35.42,49.365 36.17,50.114 36.17,51.079
FPGA_TCK: J4.1 U1.G15 | length 61.4
  Top Layer w0.5: v1(39.18,45.089) U1.G15@39.68,45.589
  Mid-Layer 1 w0.254: J4.1@5.029,9.601 3.759,10.871 3.759,20.218 4.801,21.26 19.075,21.26 32.688,34.872 32.688,39.299 32.672,39.315 32.672,41.299 35.721,44.348 38.44,44.348 v1(39.18,45.089)
FPGA_TDI: J4.9 U1.E18 | length 44.9
  Top Layer w0.5: v1(36.18,43.089) U1.E18@36.68,43.589
  Mid-Layer 1 w0.254: J4.9@5.029,19.761 18.567,19.761 33.35,34.544 33.35,40.259 v1(36.18,43.089)
FPGA_TDO: J4.3 U1.A19 | length 44.6
  Top Layer w0.5: v1(35.18,39.089) U1.A19@35.68,39.589
  Mid-Layer 1 w0.254: J4.3@5.029,12.141 6.401,13.513 13.995,13.513 34.722,34.239 34.722,38.631 v1(35.18,39.089)
FPGA_TMS: J4.5 U1.C18 | length 46
  Top Layer w0.5: v1(36.18,41.089) U1.C18@36.68,41.589
  Mid-Layer 1 w0.254: J4.5@5.029,14.681 14.402,14.681 33.985,34.265 33.985,39.7 35.374,41.089 v1(36.18,41.089)